# EAGLE board stopduino (EAGLE 5.10)
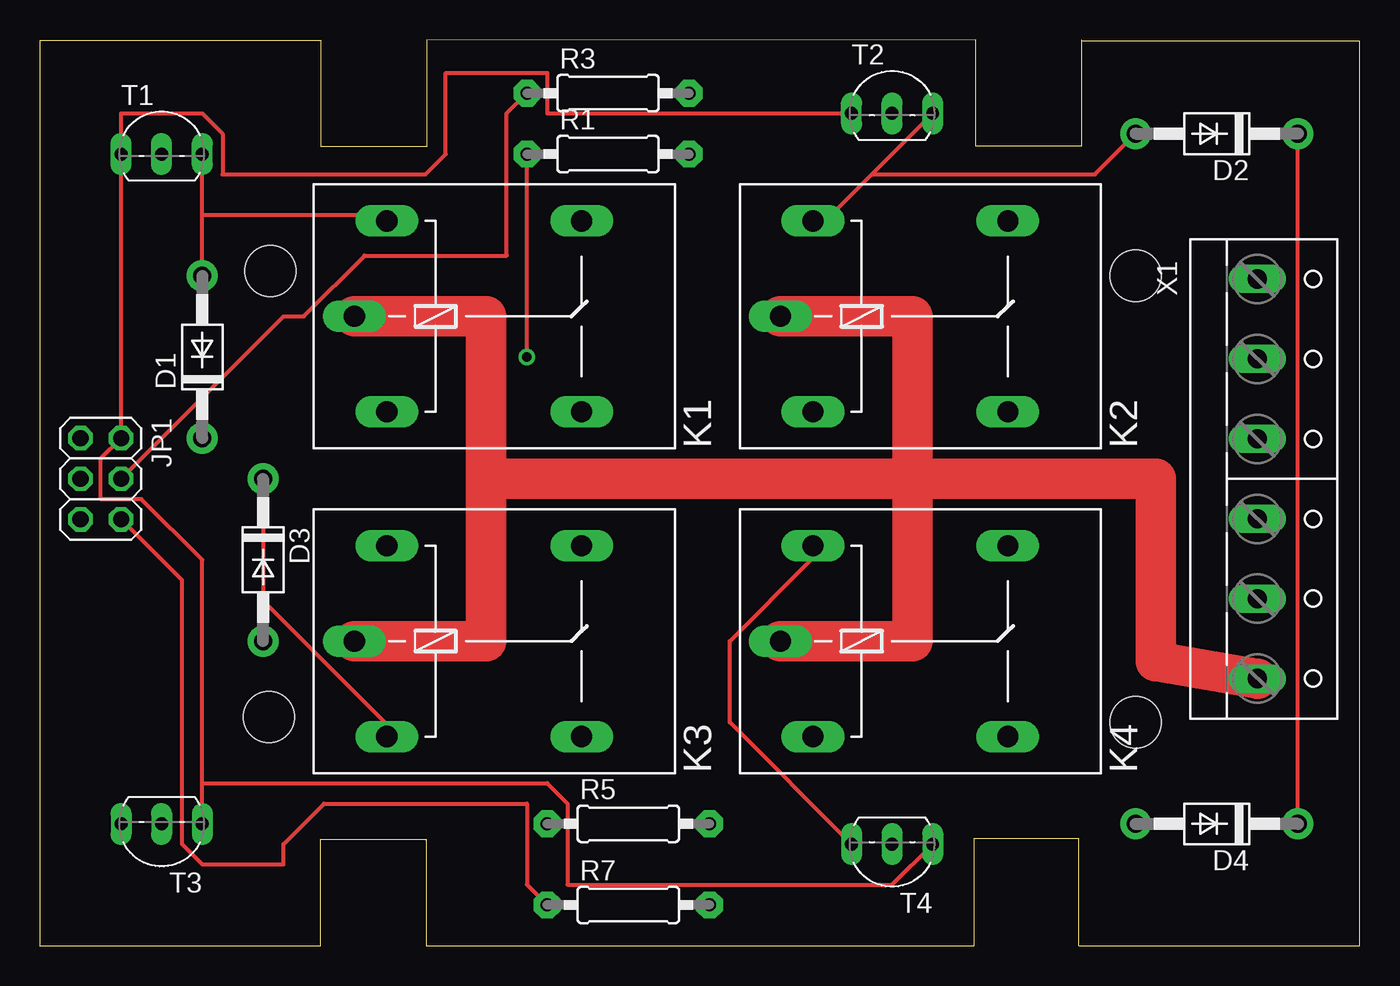
[diagram p0: board, top side]
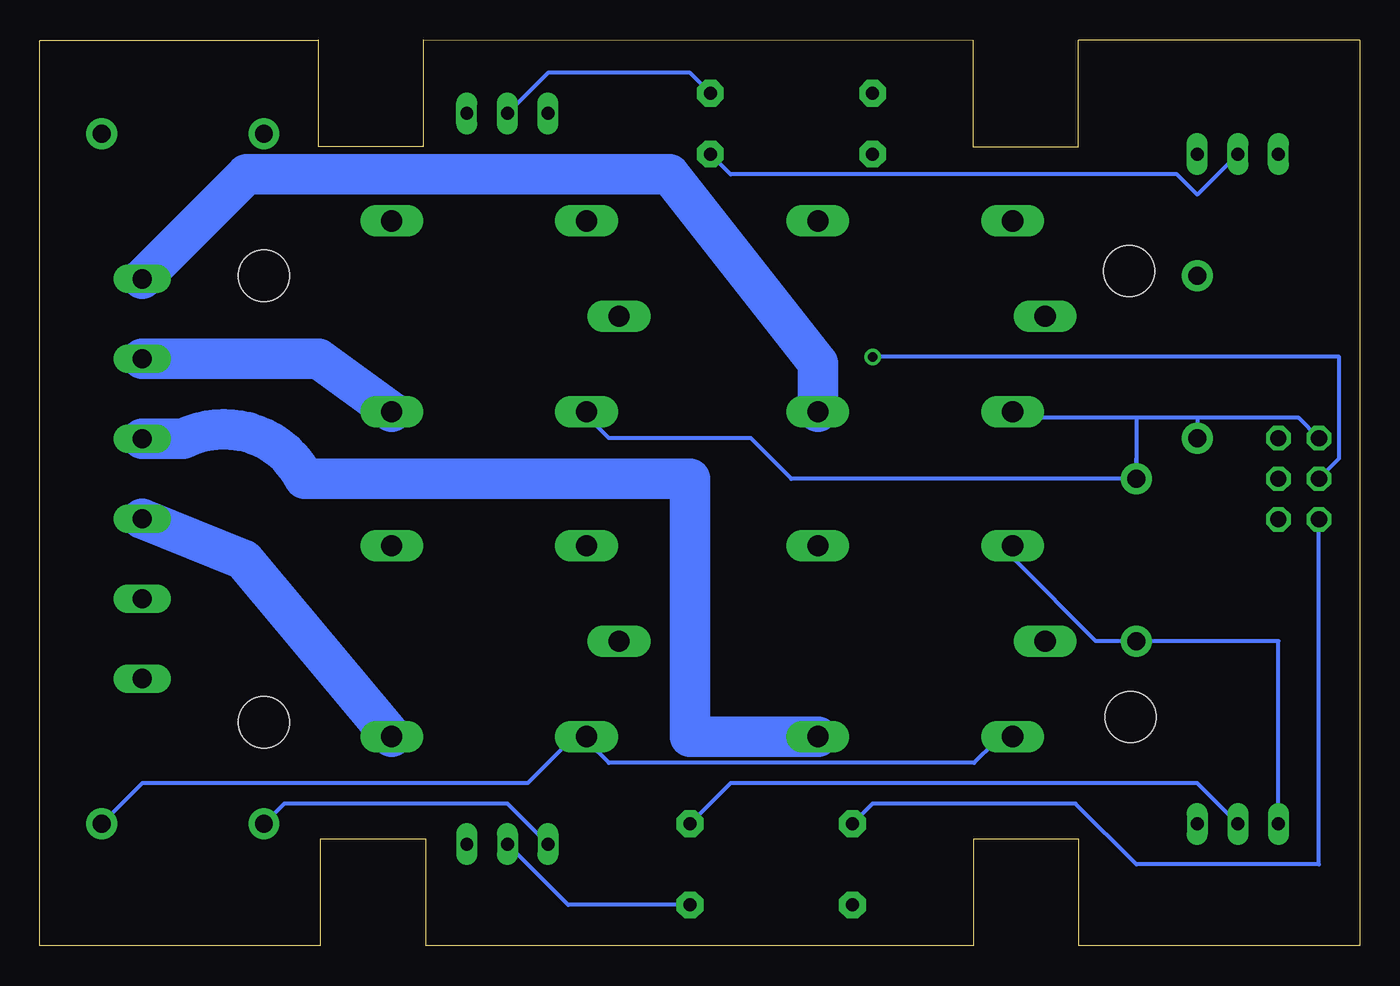
[diagram p1: board, bottom side, seen from below]

Size 82.6 x 56.67 mm. Coordinates in mm from the lower left corner, seen from the top.
Outline: 82.6,56.61 82.6,0 65.02,0 65.02,6.68 58.45,6.68 58.45,0 24.18,0 24.18,6.66 17.58,6.66 17.58,0 0,0 0,56.64 17.6,56.64 17.6,49.99 24.21,49.99 24.21,56.64 58.57,56.67 58.57,50.01 65.18,50.01 65.18,56.62
Outline: 65.18,56.67 65.18,56.62
Outline: 65.18,56.62 82.6,56.62
Copper layers (1*16): Top 0.035mm / dielectric 1.5mm / Bottom 0.035mm
Design rules "default": minimum track width 10mil, minimum drill 24mil, track to track 8mil, track to pad 8mil, pad to pad 8mil, via to via 8mil, smd to smd 8mil, copper to edge 40mil, drill to drill 8mil, minimum pad ring 10mil, minimum via ring 8mil, stop-mask expansion 4mil, vias tented up to drill 0mil, thermal gap 10mil
Holes 3.2 mm at 14.33,14.3 68.58,13.97 68.58,41.91 14.43,42.21

## Footprints (pad centres in the part's own frame; a part is rotated, then mirrored left to right if it is on the bottom)
DO41-10 = drill 1.118 pad 1.93 round: A 5.08,0; C -5.08,0
2X03 = drill 1.016 octagon: 1 -2.54,-1.27; 2 -2.54,1.27; 3 0,-1.27; 4 0,1.27; 5 2.54,-1.27; 6 2.54,1.27
G5LE = drill 1.321 long: 1 -7.493,-5.969; 2 -7.493,5.969; O 4.699,5.969; P -9.525,0; S 4.699,-5.969
0207/10 = drill 0.813 pad 1.676 octagon: 1 -5.08,0; 2 5.08,0
TO92-EBC-OVAL = drill 0.813 long: B 0,-1.27; C 2.54,-1.27; E -2.54,-1.27
W237-6 = drill 1.194 long: 1 -12.5,-1.27; 2 -7.5,-1.27; 3 -2.5,-1.27; 4 2.5,-1.27; 5 7.5,-1.27; 6 12.5,-1.27

## Placement (x,y rotation side)
D1  1N4004  [DO41-10]  10.16,36.83 90 top
D2  1N4004  [DO41-10]  73.66,50.8 180 top
D3  1N4004  [DO41-10]  13.97,24.13 270 top
D4  1N4004  [DO41-10]  73.66,7.62 180 top
JP1  [2X03]  3.81,29.21 270 top
K1  G5LE  [G5LE]  29.21,39.37 0 top
K2  G5LE  [G5LE]  55.88,39.37 0 top
K3  G5LE  [G5LE]  29.21,19.05 0 top
K4  G5LE  [G5LE]  55.88,19.05 0 top
R1  [0207/10]  35.56,49.53 0 top
R3  [0207/10]  35.56,53.34 0 top
R5  [0207/10]  36.83,7.62 0 top
R7  [0207/10]  36.83,2.54 0 top
T1  2N2222  [TO92-EBC-OVAL]  7.62,50.8 0 top
T2  2N2222  [TO92-EBC-OVAL]  53.34,53.34 0 top
T3  2N2222  [TO92-EBC-OVAL]  7.62,6.35 180 top
T4  2N2222  [TO92-EBC-OVAL]  53.34,5.08 180 top
X1  [W237-6]  77.47,29.21 270 top

## Library data of the parts
D1-D4 R1 R3 R5 R7 T1-T4 = adafruit
JP1 = pinhead
K1-K4 = relay; OC_FARNELL: unknown; OC_NEWARK: unknown
X1 = con-wago-500; OC_FARNELL: unknown; OC_NEWARK: unknown

## Nets
BEACON-AC: K4.S X1.4
BEACON-DC: JP1.6 R7.1
GND: JP1.2 T1.E T2.E T3.E T4.E
GND-AC: K1.P K2.P K3.P K4.P X1.6
GREEN-AC: K3.S X1.3
GREEN-DC: JP1.5 R5.1
N$1: D4.A K4.2 T4.C
N$2: D3.A K3.2 T3.C
N$3: D2.A K2.2 T2.C
N$4: D1.A K1.2 T1.C
N$5: R5.2 T3.B
N$6: R1.2 T1.B
N$7: R3.2 T2.B
N$8: R7.2 T4.B
RED-AC: K1.S X1.1
RED-DC: JP1.3 R1.1
VCC: D1.C D2.C D3.C D4.C JP1.1 K1.1 K2.1 K3.1 K4.1
YELLOW-AC: K2.S X1.2
YELLOW-DC: JP1.4 R3.1

## Tracks (layer width: path | path; a pad name or v marks a point on that pad's centre or on a via)
BEACON-AC
  Bottom 2.54: K4.S 69.85,24.13 X1.4
BEACON-DC
  Top 0.254: JP1.6 8.89,22.86 8.89,6.35 10.16,5.08 15.24,5.08 15.24,6.35 17.78,8.89 30.48,8.89 30.48,3.81 R7.1
GND
  Top 0.254: T3.E 10.16,10.16 | 10.16,10.16 10.16,24.13 6.35,27.94 3.81,27.94 3.81,30.48 JP1.2 T1.E 5.08,52.07 10.16,52.07 11.43,50.8 11.43,48.26 24.13,48.26 25.4,49.53 25.4,54.61 31.75,54.61 31.75,52.07 T2.E | T4.E 53.34,3.81 33.02,3.81 33.02,8.89 31.75,10.16 10.16,10.16
GND-AC
  Top 2.54: K3.P 27.94,19.05 27.94,29.21 | K1.P 27.94,39.37 27.94,29.21 | K2.P 54.61,39.37 54.61,29.21 | 27.94,29.21 54.61,29.21 | K4.P 54.61,19.05 54.61,29.21 | 54.61,29.21 69.85,29.21 69.85,17.78 X1.6
GREEN-AC
  Bottom 2.54: K3.S 41.91,13.08 41.91,29.21 66.04,29.21 arc-90 73.62,31.71 X1.3
GREEN-DC
  Bottom 0.254: JP1.5 2.54,5.08 13.97,5.08 17.78,8.89 30.48,8.89 R5.1
N$1
  Top 0.254: T4.C 43.18,13.97 43.18,19.05 48.26,24.13 K4.2
  Bottom 0.254: T4.C 53.34,8.89 67.31,8.89 D4.A
N$2
  Bottom 0.254: T3.C 5.08,19.05 D3.A 16.51,19.05 21.59,24.13 K3.2
N$3
  Top 0.254: 52.07,48.26 49.53,45.72 K2.2 | 52.07,48.26 T2.C | 52.07,48.26 66.04,48.26 D2.A
N$4
  Top 0.254: D1.A 10.16,45.72 | 10.16,45.72 T1.C | 10.16,45.72 21.59,45.72 K1.2
N$5
  Bottom 0.254: T3.B 10.16,10.16 39.37,10.16 R5.2
N$6
  Bottom 0.254: T1.B 10.16,46.99 11.43,48.26 39.37,48.26 R1.2
N$7
  Bottom 0.254: T2.B 50.8,54.61 41.91,54.61 R3.2
N$8
  Bottom 0.254: T4.B 49.53,2.54 R7.2
RED-AC
  Bottom 2.54: K1.S 33.91,36.45 43.18,48.26 69.65,48.26 X1.1
RED-DC  (via drill 0.61)
  Top 0.254: v30.48,36.83 R1.1
  Bottom 0.254: JP1.3 1.27,30.48 1.27,36.83 v30.48,36.83
VCC
  Top 0.254: D3.C 13.97,21.59 21.59,13.97 K3.1 | D4.C D2.C
  Bottom 0.254: JP1.1 3.81,33.02 10.16,33.02 | 13.97,33.02 21.59,33.02 K1.1 | 10.16,33.02 13.97,33.02 | 10.16,33.02 D1.C | D3.C 13.97,30.48 | 13.97,33.02 D3.C | D3.C 35.56,29.21 38.1,31.75 46.99,31.75 48.26,33.02 K2.1 | K3.1 22.86,12.7 24.13,11.43 46.99,11.43 48.26,12.7 K4.1 49.53,12.7 52.07,10.16 76.2,10.16 D4.C
YELLOW-AC
  Bottom 2.54: K2.S 65.16,36.71 X1.2
YELLOW-DC
  Top 0.254: JP1.4 15.24,39.37 16.51,39.37 20.32,43.18 29.21,43.18 29.21,52.07 R3.1